# Altium PCB TVS_Layout.PcbDoc
Units mil, origin at the board's own origin, x right, y up, seen from the top; angles counter-clockwise.
Board outline 500 x 600 mil, 2 copper layers (Top Layer, Bottom Layer); 5 components, 7 nets, 20 pads, 2 vias.
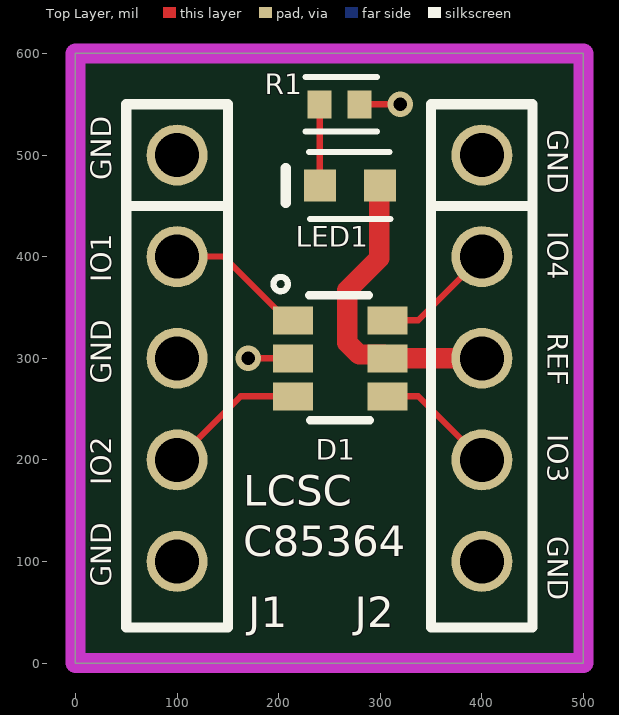
[diagram p0: Top Layer view]
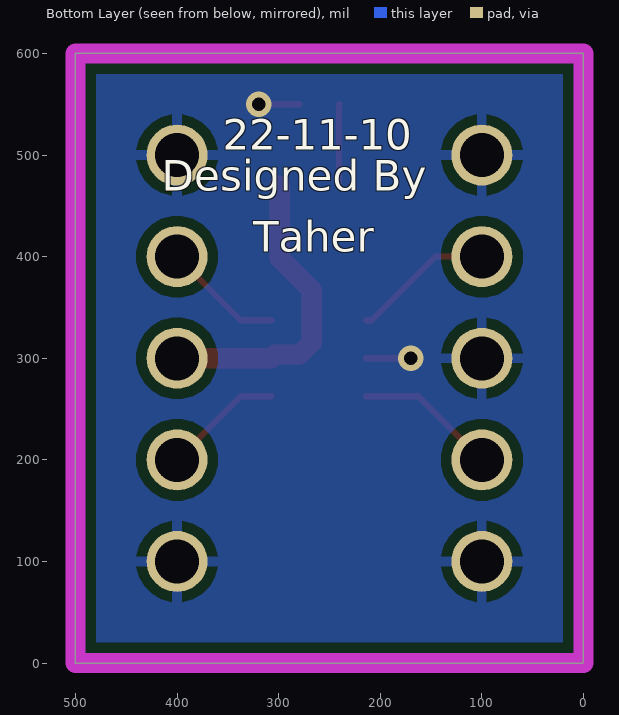
[diagram p1: Bottom Layer view, seen from below]
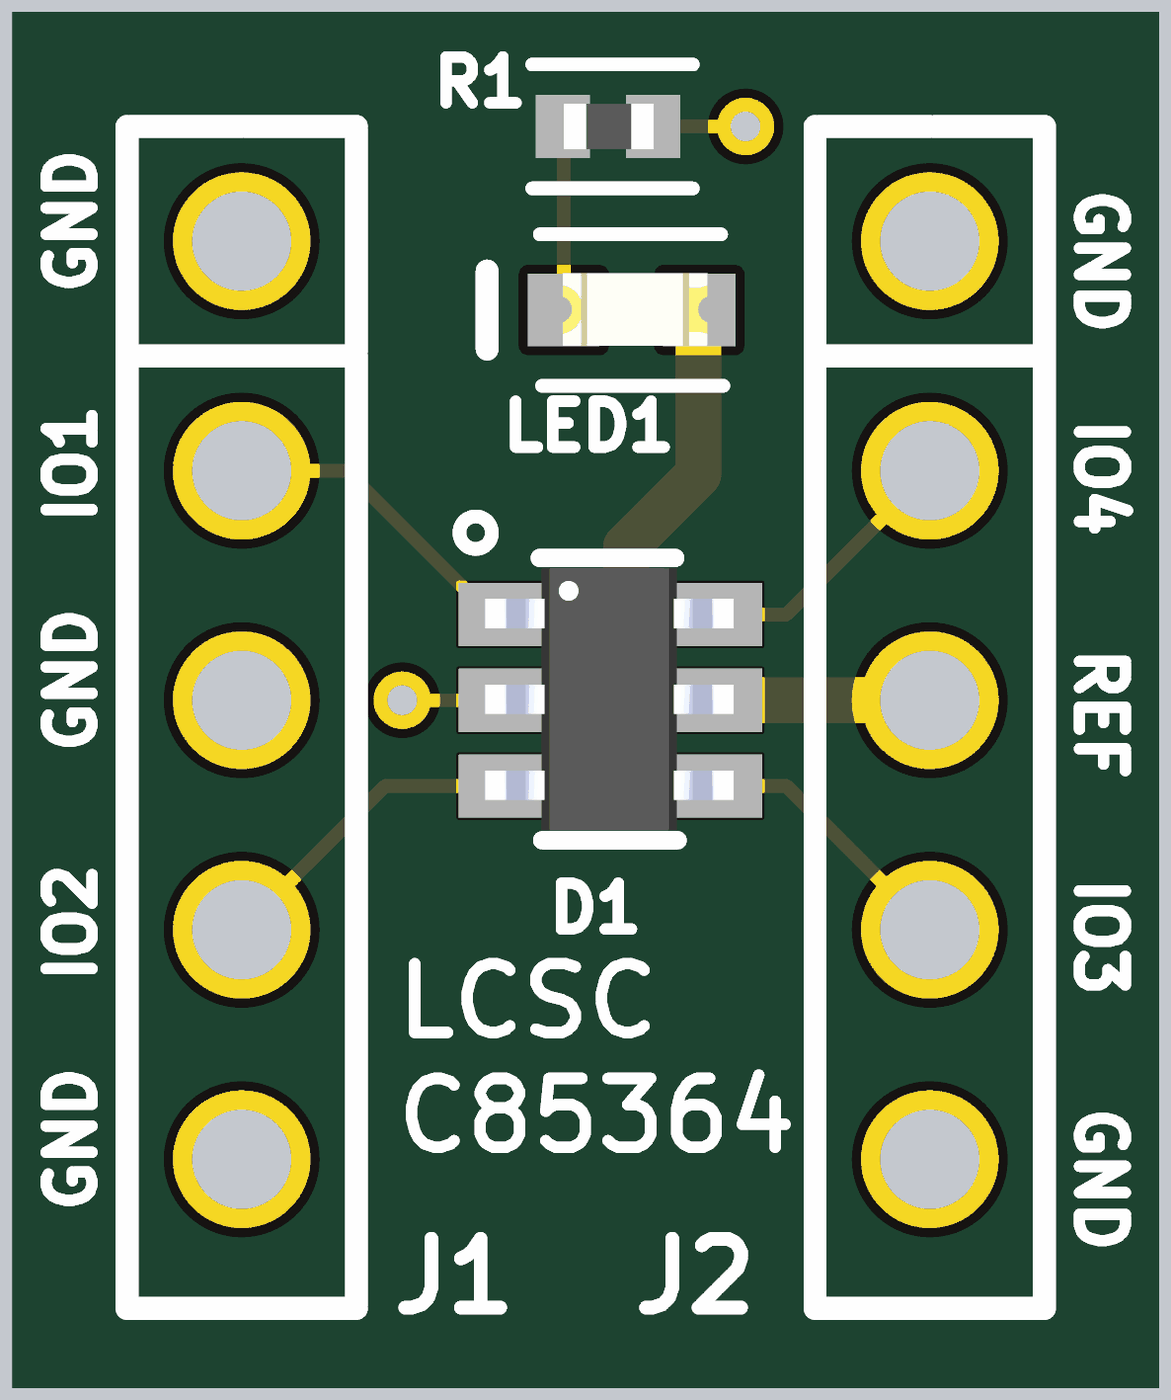
[diagram p2: 3D render of the assembled board from above, using the file's embedded part models]

## Layer stack, top to bottom
Top Solder: solder mask 0.4, Solder Resist, Dk 3.5
Top Layer: signal copper 1.4
Dielectric 1: dielectric 12.6, FR-4, Dk 4.8
Bottom Layer: signal copper 1.4
Bottom Solder: solder mask 0.4, Solder Resist, Dk 3.5

## Board outline
0,0 500,0 500,600 0,600

## Design rules (kind name [scope] priority, off if disabled: settings)
Clearance [All] p1: gap=10 ignorepadtopadclearanceinfootprint=FALSE except(0: Arc-Hole Track-Hole SMDPad-Hole THPad-Hole Via-Hole Fill-Hole Poly-Hole Region-Hole Text-Hole)
MinimumSolderMaskSliver [All] p1: minsoldermaskwidth=6
PolygonConnect [All] p1: connectstyle=Relief reliefconductorwidth=10 reliefentries=4 polygonreliefangle="90 Angle" airgapwidth=10
RoutingVias [All] p1: holewidth=13 width=25 viastyle="Through Hole" minholewidth=13 minwidth=25 maxholewidth=60 maxwidth=80
SilkToSilkClearance [All] p1: silktosilkclearance=6
SilkToSolderMaskClearance [IsPad] p1: minsilkscreentomaskgap=6 clearancetoexposedcopper=TRUE
SolderMaskExpansion [All] p1: expansion=4 istentingtop=FALSE
UnRoutedNet [All] p1: checkbadconnections=TRUE
Width REF [InNet('REF')] p1: maxlimit=20 minlimit=20 preferedwidth=20
Width [All] p2: maxlimit=10 minlimit=6 preferedwidth=6
26 further rules are at their usual default settings.

## Components (designator, comment, footprint, x,y, rotation, side; value= is the part's Value field where it differs from the comment)
D1 "SRV05-4-P-T7" TVS 260,300 r0 top value="TVS DIODE 5.5V 6TSOP"
J1 "J_5_PIN_HEADER" 5_PIN_100MIL 100,500 r270 top
J2 "J_5_PIN_HEADER" 5_PIN_100MIL 400,500 r270 top
LED1 "0603R" LED_0603 270,470 r180 top value=Red
R1 "1k" 0402_Passive_Resistor 259.68,550 r0 top value="1K Ohm"

## Footprints (in the part's own frame and the unit in brackets; to place one, negate y for a bottom-side part, rotate by r counter-clockwise, add the part's x,y. Pads: shape width x height; smd on the part's side, far side on the other; paste and mask are expansions set on the pad)
5_PIN_100MIL [mil]
  round 60 hole 43.31: 1(0,0) 2(100,0) 3(200,0) 4(300,0) 5(400,0)
  silkscreen extent -50,-50 465,50
0402_Passive_Resistor [mm] "Reference: https://www.worthingtonassembly.com/perfect-0402-footprint"
  rect 0.6x0.7 smd mask+0: 1(-0.5,0) 2(0.5,0)
  silkscreen extent -0.84,-0.69 0.94,0.69, body extent -0.49,-0.25 0.51,0.25, height 0.4
LED_0603 [mm]
  rect 0.8x0.8 smd: 1(-0.75,0) 2(0.75,0)
  silkscreen extent -1.02,-0.84 1.6,0.84, body extent -0.84,-0.41 0.76,0.39, height 0.55
TVS [mm]
  rect 1x0.7 smd mask+0.025: 1(-1.162,0.95) 2(-1.162,0) 3(-1.162,-0.95) 4(1.2,-0.95) 5(1.2,0) 6(1.2,0.95)
  silkscreen extent -1.65,-1.55 0.76,2.03, body extent -1.37,-1.44 1.38,1.46, height 1.1

## Part data
D1: library part D_TVS_Diode, "TVS SOT-23-6 ROHS", LCSC Part#=C85364, Datasheet=https://datasheet.lcsc.com/szlcsc/ProTek-Devices-SRV05-4-P-T7_C85364.pdf, MFR Part #=SRV05-4-P-T7, Type=Basic
J1 J2: "5 Position Header Connector 0.100\" (2.54mm) Through Hole Tin"
LED1: library part LED_RED_0603, "LIGHT EMITTING DIODES (LED) RED 520~625NM 90~100MCD@20MA TOP VIEW 0603 ROHS", LCSC Part#=C2286, MFR Part #=KT-0603R, Datasheet=https://datasheet.lcsc.com/szlcsc/Everlight-Elec-19-217-BHC-ZL1M2RY-3T_C72041.pdf, Type=Basic
R1: library part R_1K_0402, "1 kOhms chip resistor SURFACE MOUNT 1KOHMS ±1% 1/16W 0402 ROHS", LCSC Part#=C11702, MFR Part #=0402WGF1001TCE, Datasheet=https://datasheet.lcsc.com/szlcsc/Uniroyal-Elec-0402WGF1001TCE_C11702.pdf, Type=Basic

## Via types
v1: diameter 25, hole 13, Top Layer to Bottom Layer, 2 vias

## Nets (pads, with @x,y where several pads share a name; then routed paths per layer and width w, separated by ;. In a path a pad name is that pad's centre, name@x,y a point inside that pad or via, vN(x,y) a via of type N, cw(c..) or ccw(c..) an arc to the next point about the centre after c; other vN are vias at no path point)
GND: D1.2 J1.1 J1.3 J1.5 J2.1 J2.5 R1.2 | length 85
  Top Layer w6: v1(170,300) D1.2 ; R1.2@279.68,549.69 R1.2 v1(319.68,550)
IO1: D1.1 J1.2 | length 140.2
  Top Layer w6: J1.2 145.73,400 208.33,337.4 D1.1
IO2: D1.3 J1.4 | length 140.2
  Top Layer w6: J1.4 162.6,262.6 D1.3
IO3: D1.4 J2.4 | length 118.7
  Top Layer w6: D1.4 337.4,262.6 J2.4
IO4: D1.6 J2.2 | length 118.7
  Top Layer w6: D1.6 337.4,337.4 J2.2
NetLED1_2: LED1.2 R1.1 | length 80.6
  Top Layer w6: R1.1 240.47,549.53 LED1.2 LED1.2@240.79,470.31
REF: D1.5 J2.3 LED1.1 | length 306.7
  Top Layer w20: LED1.1 299.06,469.53 299.06,398.42 267.56,366.92 267.56,315.34 279.27,303.62 303.62,303.62 D1.5 J2.3

## Polygon pours and split planes (outlines as drawn)
GND on Bottom Layer "GND_L02_P000" (solid, pour order 0): 0,600 500,600 500,0 0,0

## Keep-outs
Keep-Out Layer:
  the board outline again, w20

## Silkscreen, mask and mechanical layers (free items; w line width, h text height)
Top Overlay:
  text "GND" at 465,525 h20 r270
  text "GND" at 35,475 h20 r90
  text "IO4" at 465,425 h20 r270
  text "IO1" at 35,375 h20 r90
  text "REF" at 465,325 h20 r270
  text "GND" at 35,275 h20 r90
  text "IO3" at 465,225 h20 r270
  text "IO2" at 35,175 h20 r90
  text "LCSC" at 165,155 h30
  text "GND" at 465,125 h20 r270
  text "C85364" at 165,105 h30
  text "GND" at 35,75 h20 r90
Bottom Overlay:
  text "22-11-10" at 355,505 h30
  text "Designed By" at 415,465 h30
  text "Taher" at 325,405 h30